# Altium PCB main.PcbDoc
Units mm, origin at the board's own origin, x right, y up, seen from the top; angles counter-clockwise.
Board outline 80 x 30.65 mm, 2 copper layers (Top Layer, Bottom Layer); 38 components, 28 nets, 167 pads, 35 vias.
Unrouted connection lines stored in the file: 1.
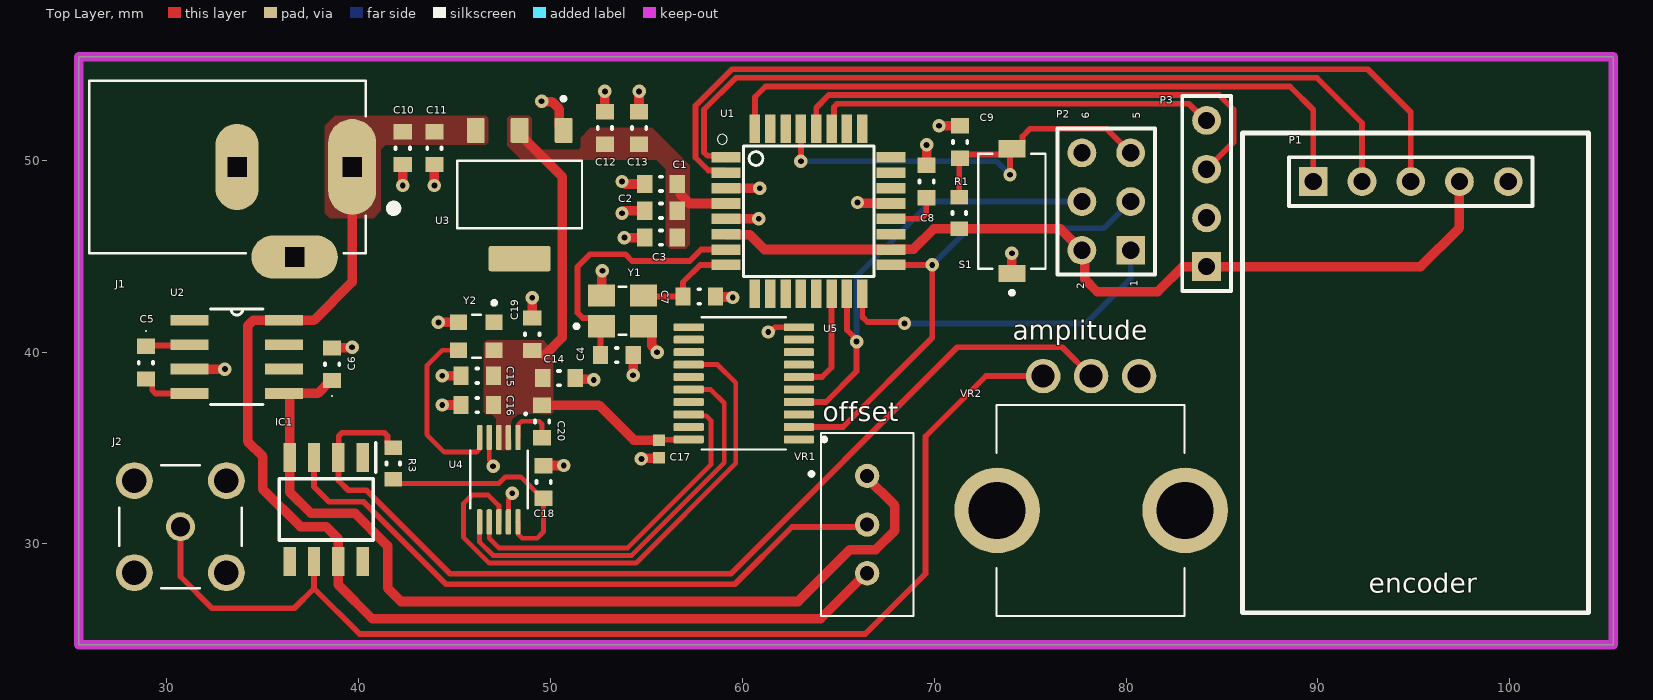
[diagram p0: Top Layer view]
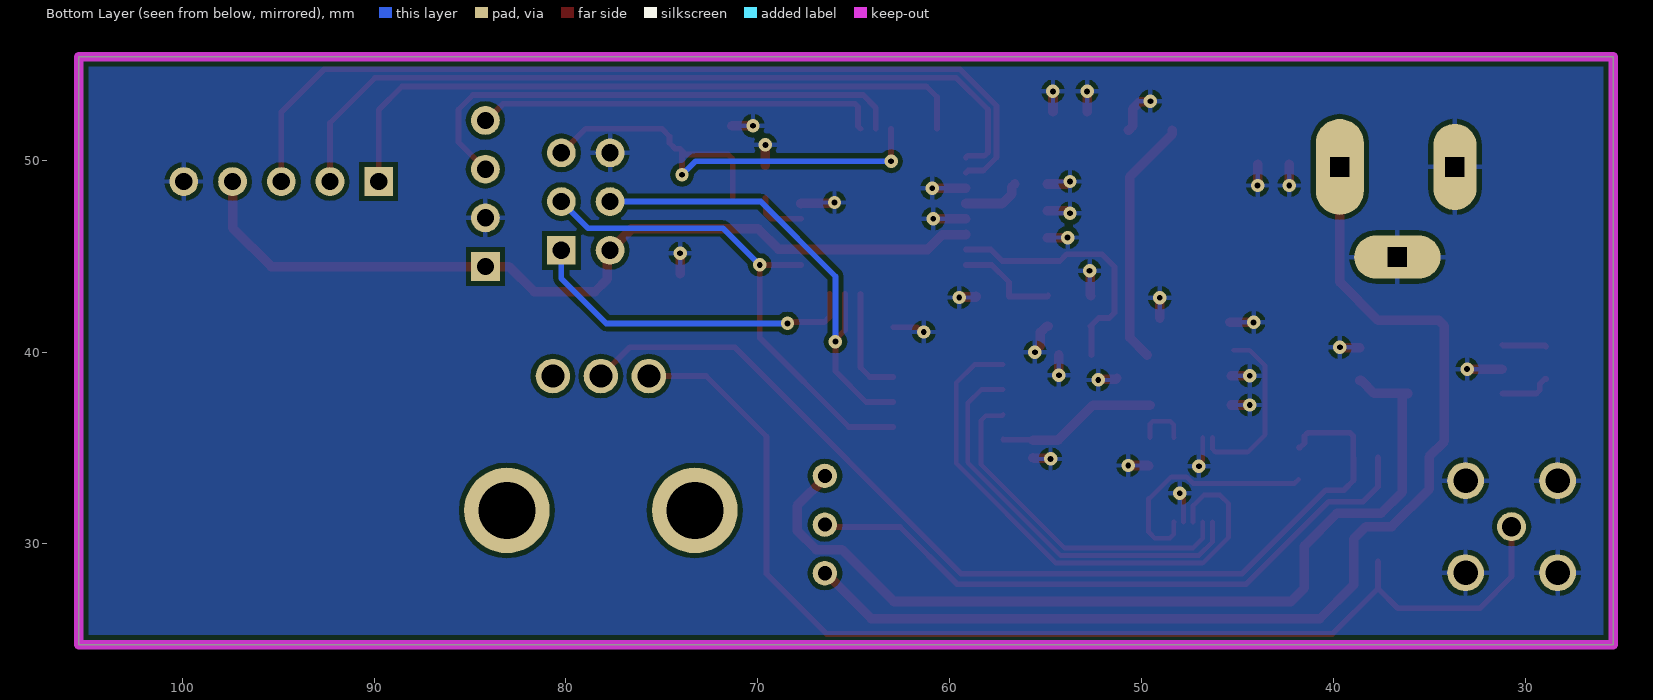
[diagram p1: Bottom Layer view, seen from below]
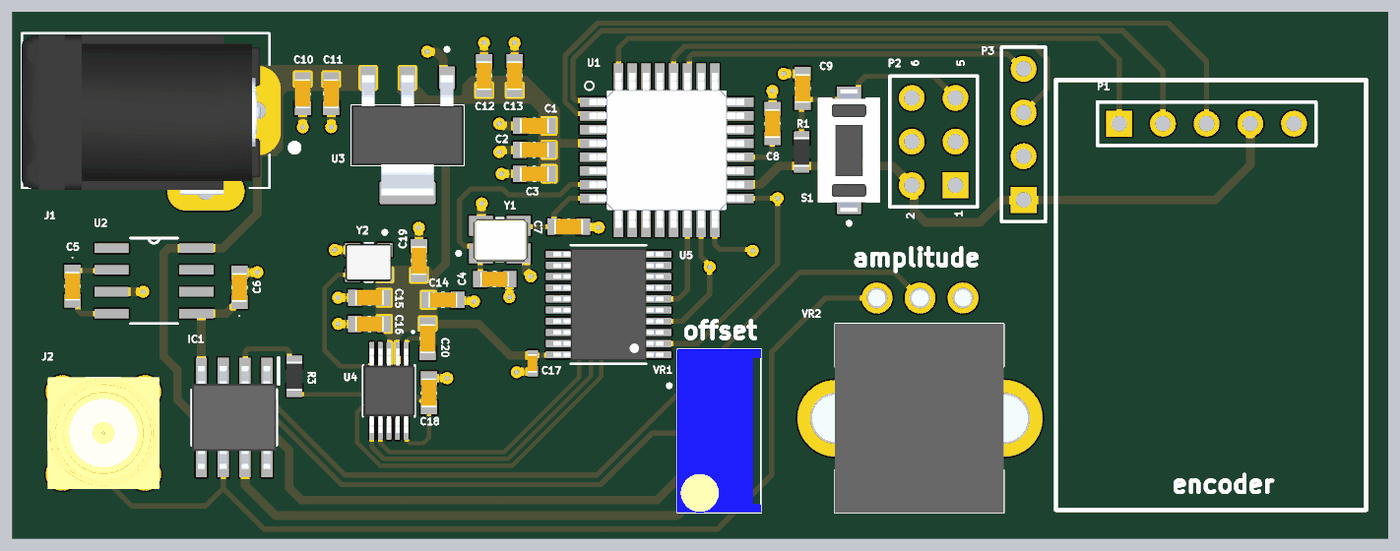
[diagram p2: 3D render of the assembled board from above, using the file's embedded part models]

## Layer stack, top to bottom
Top Solder: solder mask 0.0102, Solder Resist, Dk 3.5
Top Layer: signal copper 0.0356
Dielectric 1: dielectric 0.32, FR-4, Dk 4.8
Bottom Layer: signal copper 0.0356
Bottom Solder: solder mask 0.0102, Solder Resist, Dk 3.5

## Board outline
25.4,24.75 25.4,55.4 105.4,55.4 105.4,24.75

## Design rules (kind name [scope] priority, off if disabled: settings)
Clearance [All] p1: gap=0.254 ignorepadtopadclearanceinfootprint=FALSE except(0: Arc-Hole Track-Hole SMDPad-Hole THPad-Hole Via-Hole Fill-Hole Poly-Hole Region-Hole Text-Hole; 0.127: Track-Track SMDPad-SMDPad SMDPad-Poly SMDPad-Region)
PlaneConnect [All] p1: planeconnectstyle=Direct reliefexpansion=0.508 reliefentries=4 reliefconductorwidth=0.254 reliefairgap=0.254
PolygonConnect PowerConnectStyle [InNet('GND')] p1: connectstyle=Relief reliefconductorwidth=0.254 reliefentries=4 polygonreliefangle="90 Angle" airgapwidth=0.254
PolygonConnect PuddleConnectStyle [All] p2: connectstyle=Direct reliefconductorwidth=0.254 reliefentries=4 polygonreliefangle="90 Angle" airgapwidth=0.254
RoutingVias [All] p1: holewidth=0.711 width=1.27 viastyle="Through Hole" minholewidth=0.711 minwidth=1.27 maxholewidth=0.711 maxwidth=1.27
SolderMaskExpansion [All] p1: expansion=0.102 istentingtop=FALSE
Width [All] p1: maxlimit=0.5 minlimit=0.254 preferedwidth=0.3
29 further rules are at their usual default settings.

## Components (designator, comment, footprint, x,y, rotation, side; value= is the part's Value field where it differs from the comment)
C1 "100nF" CAP_0603 55.753,48.768 r0 top
C2 "100nF" CAP_0603 55.753,47.371 r0 top
C3 "10uF" CAP_0603 55.753,45.974 r0 top
C4 "50pF" CAP_0603 53.45,39.85 r180 top
C5 "10uF" CAP_0603_Polarized 28.9,39.45 r270 top
C6 "10uF" CAP_0603_Polarized 38.608,39.37 r90 top
C7 "50pF" CAP_0603 57.75,42.9 r180 top
C8 "100nF" CAP_0603 69.6,48.9 r270 top
C9 "100nF" CAP_0603 71.35,50.95 r270 top
C10 "10uF" CAP_0603 42.291,50.634 r90 top
C11 "100nF" CAP_0603 43.942,50.634 r90 top
C12 "10uF" CAP_0603 52.832,51.689 r270 top
C13 "100nF" CAP_0603 54.61,51.689 r270 top
C14 "100nF" CAP_0603 50.442,38.646 r180 top
C15 "10uF" CAP_0603 46.174,38.767 r0 top
C16 "100nF" CAP_0603 46.174,37.243 r0 top
C17 "100nF" CAP_0402 55.65,34.95 r90 top
C18 "100nF" CAP_0603 49.631,33.23 r270 top
C19 "100nF" CAP_0603 49.045,40.932 r270 top
C20 "10nF" CAP_0603 49.553,36.387 r90 top
IC1 "TL071CDR" SOIC127P600X175-8N 38.3,31.8 r270 top
J1 "PJ_002AH" DCJack_3pins 39.655,49.657 r0 top
J2 "SMA_Connector" SMA_Connector 30.7,30.9 r0 top
P1 "Header 5" HDR1X5 89.762,48.894 r0 top
P2 "Header 3X2" HDR2X3 80.24,45.31 r90 top
P3 "Header 4" HDR1X4 84.2,44.46 r90 top
R1 "10k" RES_0603 71.3,47.25 r270 top
R3 "2.2k" RES_0603 41.8,34.2 r270 top
S1 "Switch_SPST" SPST-NO_Switch 74.05,44.1 r90 top
U1 "Atmega328-AU" ATMEGA328-AU 59.15,50.15 r0 top
U2 "ICL7660AIBAZA-T" ICL7660AIBAZA-T 31.179,41.656 r0 top
U3 "AMS1117-3.3" SOT229P700X180-4N 50.673,51.562 r270 top
U4 "AD9833BRMZ-REEL7" AD9833BRMZ-REEL7 47.3,33.35 r270 top
U5 "3-Wire Buffer Driver" SOP65P640X120-20N 62.94,35.45 r180 top
VR1 "3296W-1-103" 3296W1103 66.5,33.55 r0 top
VR2 "RK09K1130ACL" RK09K1130ACL 78.179,38.75 r180 top
Y1 "Crystal Oscillator" 4pinOscillator 52.65,41.35 r0 top
Y2 "S3D25.000000A20F30T" OSC_ECS-327TXO-30-TR 47.05,41.55 r180 top

## Footprints (in the part's own frame and the unit in brackets; to place one, negate y for a bottom-side part, rotate by r counter-clockwise, add the part's x,y. Pads: shape width x height; smd on the part's side, far side on the other; paste and mask are expansions set on the pad)
4pinOscillator [mm] "SMD3225-4P"
  rect 1.4x1.15 smd: 1(0,0) 2(2.2,0) 3(2.2,1.6) 4(0,1.6)
  silkscreen extent -1.4,-0.45 1.3,2.05, body extent -0.46,-0.49 2.74,2.01, height 0.6
3296W1103 [mm]
  round 1.269 hole 0.74: 1(0,0) 2(0,-2.54) 3(0,-5.08)
  silkscreen extent -3,-7.3 2.42,2.22, body extent -2.42,-7.29 2.42,2.21, height 11.44
AD9833BRMZ-REEL7 [mm] "10-MSOP"
  rrect50% 1.32x0.28 smd: 1(-2.2,1) 2(-2.2,0.5) 3(-2.2,0) 4(-2.2,-0.5) 5(-2.2,-1) 6(2.2,-1) 7(2.2,-0.5) 8(2.2,0) 9(2.2,0.5) 10(2.2,1)
  silkscreen extent -3.48,-1.5 1.5,1.5, body extent -2.45,-1.5 2.45,1.5, height 1.07
ATMEGA328-AU [mm] "TQFP-32(7x7)"
  rect 1.5x0.55 smd: 1(0,0) 2(0,-0.8) 3(0,-1.6) 4(0,-2.4) 5(0,-3.2) 6(0,-4) 7(0,-4.8) 8(0,-5.6) 17(8.6,-5.6) 18(8.6,-4.8) 19(8.6,-4) 20(8.6,-3.2) 21(8.6,-2.4) 22(8.6,-1.6) 23(8.6,-0.8) 24(8.6,0)
  rect 0.55x1.5 smd: 9(1.5,-7.1) 10(2.3,-7.1) 11(3.1,-7.1) 12(3.9,-7.1) 13(4.7,-7.1) 14(5.5,-7.1) 15(6.3,-7.1) 16(7.1,-7.1) 25(7.1,1.5) 26(6.3,1.5) 27(5.5,1.5) 28(4.7,1.5) 29(3.9,1.5) 30(3.1,1.5) 31(2.3,1.5) 32(1.5,1.5)
  silkscreen extent -0.45,-6.2 7.7,1.2, body extent -0.2,-7.3 8.8,1.7, height 1.18
CAP_0402 [mm] "Chip Capacitor, 2-Leads, Body 1,00x0,50mm, IPC Medium Density, 0402"
  rect 0.6x0.62 smd: 1(-0.46,0) 2(0.46,0)
  body extent -0.55,-0.3 0.55,0.3, height 0.6
CAP_0603 [mm] "Chip Capacitor, 2-Leads, Body 1,60x0,80mm, IPC Medium Density, 0603"
  rect 0.8x0.95 smd: 1(-0.85,0) 2(0.85,0)
  silkscreen extent -0.05,-0.38 0.05,0.38, body extent -0.85,-0.45 0.85,0.45, height 0.6
CAP_0603_Polarized [mm] "Chip Capacitor, 2-Leads, Body 1,60x0,80mm, IPC Medium Density, 0603, Polarized"
  rect 0.8x0.95 smd: 1(-0.85,0) 2(0.85,0)
  silkscreen extent -1.67,-0.38 0.05,0.38, body extent -0.85,-0.45 0.85,0.45, height 0.6
DCJack_3pins [mm]
  oval 2.5x5 hole 1 square: 1(0,0)
  oval 2.25x4.5 hole 1 square: 2(-6,0)
  oval 4.5x2.25 hole 1 square: 3(-3,-4.7)
  silkscreen extent -13.7,-4.5 2.36,4.5, body extent -13.72,-4.9 0.18,4.4, height 11
HDR1X4 [mm] "Connector; Header; 4 Position"
  rect 1.5x1.5 hole 0.9: 1(0,0)
  round 1.5 hole 0.9: 2(2.54,0) 3(5.08,0) 4(7.62,0)
  silkscreen extent -1.27,-1.27 8.89,1.27
HDR1X5 [mm] "Connector; Header; 5 Position"
  rect 1.5x1.5 hole 0.9: 1(0,0)
  round 1.5 hole 0.9: 2(2.54,0) 3(5.08,0) 4(7.62,0) 5(10.16,0)
  silkscreen extent -1.27,-1.27 11.43,1.27
HDR2X3 [mm] "Connector; Header; 3x2 Position"
  rect 1.5x1.5 hole 0.9: 1(0,0)
  round 1.5 hole 0.9: 2(0,2.54) 3(2.54,0) 4(2.54,2.54) 5(5.08,0) 6(5.08,2.54)
  silkscreen extent -1.27,-1.27 6.35,3.81
ICL7660AIBAZA-T [mil] "SOIC-8"
  rect 78x22 smd: 1(0,0) 2(0,-50) 3(0,-100) 4(0,-150) 5(194,-150) 6(194,-100) 7(194,-50) 8(194,0)
  silkscreen extent 43,-173 151,23
OSC_ECS-327TXO-30-TR [mm] "25MHz - 2.5*2.0mm -  SMD3225-4P"
  rect 0.9x0.8 smd: 1(0,0) 2(1.85,0) 3(1.85,1.45) 4(0,1.45)
  silkscreen extent -0.11,-1.12 1.15,1.85, body extent -0.43,-0.39 2.28,1.85, height 1.2
RES_0603 [mm] "Chip Resistor, 2-Leads, Body 1,60x0,80mm, IPC Medium Density, 0603"
  rect 0.75x0.9 smd: 1(-0.825,0) 2(0.825,0)
  silkscreen extent -0.05,-0.35 0.05,0.35, body extent -0.85,-0.45 0.85,0.45, height 0.6
RK09K1130ACL [mm]
  round 1.8 hole 1.2: 1(-2.5,0) 2(0,0) 3(2.5,0)
  round 4.46 hole 2.973: MH1(-4.9,7) MH2(4.9,7)
  silkscreen extent -4.86,1.5 4.94,12.5, body extent -6.28,-0.5 6.29,12.5, height 15.1
SMA_Connector [mm]
  round 1.508 hole 1: 1(0,0)
  round 1.92 hole 1.28: G1(-2.4,2.4) G2(-2.4,-2.4) G3(2.4,-2.4) G4(2.4,2.4)
  silkscreen extent -3.2,-3.2 3.2,3.2, body extent -3.25,-3.25 3.25,3.25, height 13.6
SOIC127P600X175-8N [mm]
  rect 1.525x0.65 smd: 1(-2.712,1.905) 2(-2.712,0.635) 3(-2.712,-0.635) 4(-2.712,-1.905) 5(2.712,-1.905) 6(2.712,-0.635) 7(2.712,0.635) 8(2.712,1.905)
  silkscreen extent -3.47,-2.45 1.6,2.58, body extent -3,-2.45 3,2.45, height 1.75
SOP65P640X120-20N [mm] "3-Wire buffer driver"
  rrect25% 1.57x0.41 smd: 1(0,0) 2(0,-0.65) 3(0,-1.3) 4(0,-1.95) 5(0,-2.6) 6(0,-3.25) 7(0,-3.9) 8(0,-4.55) 9(0,-5.2) 10(0,-5.85) 11(5.74,-5.85) 12(5.74,-5.2) 13(5.74,-4.55) 14(5.74,-3.9) 15(5.74,-3.25) 16(5.74,-2.6) 17(5.74,-1.95) 18(5.74,-1.3) 19(5.74,-0.65) 20(5.74,0)
  silkscreen extent -1.42,-6.38 5.07,0.53, body extent -0.33,-6.18 6.07,0.33, height 1.2
SOT229P700X180-4N [mm] "AMS1117-3.3"
  rrect15% 1.31x0.93 smd: 1(0,0) 2(0,-2.29) 3(0,-4.58)
  rrect15% 1.31x3.24 smd: 4(6.69,-2.29)
  silkscreen extent -1.75,-5.54 5.1,0.96, body extent -0.15,-5.54 6.84,0.96, height 1.8
SPST-NO_Switch [mm]
  rect 0.9x1.4 smd: 1(0,0) 2(6.5,0)
  silkscreen extent -1.1,-1.75 6.25,1.75, body extent -0.32,-1.75 6.78,1.75, height 4.3

## Part data
C1 C2 C3 C4 C7 C8 C9 C10 C11 C12 C13 C14 C15 C16 C18 C19 C20: library part Cap_0603, "Capacitor SMD 0603 Generic"
C5 C6: library part Cap_0603_Polarized, "Capacitor SMD 0603 Generic Polarized"
C17: library part Cap_0402, "Capacitor SMD 0402 Generic"
IC1: "Integrated Circuit", Manufacturer_Name="Texas Instruments", Mouser Part Number=595-TL071CDR, Arrow Part Number=TL071CDR, Arrow Price/Stock=https://www.arrow.com/en/products/tl071cdr/texas-instruments?region=nac, Datasheet Link=http://www.ti.com/lit/gpn/tl071, Height=1.75mm, Manufacturer_Part_Number=TL071CDR, Mouser Price/Stock=https://www.mouser.co.uk/ProductDetail/Texas-Instruments/TL071CDR?qs=odmYgEirbwyeR17frtRMJg%3D%3D
J1: library part DCJack_3pins
J2: "RF Coaxial Straight SMA Connector"
P1: "Header, 5-Pin", LatestRevisionDate=17-Jul-2002, LatestRevisionNote="Re-released for DXP Platform.", Publisher="Altium Limited"
P2: "Header, 3-Pin, Dual row", LatestRevisionDate=17-Jul-2002, LatestRevisionNote="Re-released for DXP Platform.", Publisher="Altium Limited"
P3: "Header, 4-Pin", LatestRevisionDate=17-Jul-2002, LatestRevisionNote="Re-released for DXP Platform.", Publisher="Altium Limited"
R1 R3: library part Res_0603, "Resistor SMD 0603 Generic"
S1: "Switch_SPST 2 pins"
U1: "AVR AVR® ATmega Microcontroller IC 8-Bit 20MHz 32KB (16K x 16) FLASH 32-TQFP (7x7)"
U2: library part ICL7660A, "Charge Pump Switching Regulator IC Positive or Negative Fixed -Vin, 2Vin 1 Output 45mA 8-SOIC (0.154\", 3.90mm Width)"
U3: "Sot223/Pkg 1-Amp 3.3-Volt Low Drop Out Voltage Regulatator"
U4: "Direct Digital Synthesis IC 10 b 25 MHz 28 b Tuning 10-MSOP"
U5: library part SN74HCT244PWR, "Octal Buffers And Line Drivers With 3-State Outputs 20-TSSOP -40 to 85"
VR1: "Variable Resistor", Manufacturer_Name="Chengdu Guosheng Tech", Datasheet Link=https://datasheet.lcsc.com/szlcsc/1811271436_Chengdu-Guosheng-Tech-3296W-1-103_C330432.pdf, Height=10.28mm, Manufacturer_Part_Number=3296W-1-103
VR2: "Variable Resistor", Manufacturer_Name="ALPS Electric", Mouser Part Number=688-RK09K1130ACL, Arrow Part Number=RK09K1130ACL, Arrow Price/Stock=https://www.arrow.com/en/products/rk09k1130acl/alps-electric, Datasheet Link=https://www.alps.com/prod/info/E/HTML/Potentiometer/RotaryPotentiometers/RK09K/RK09K1130ACL.html, Height=15mm, Manufacturer_Part_Number=RK09K1130ACL, Mouser Price/Stock=https://www.mouser.co.uk/ProductDetail/Alps-Alpine/RK09K1130ACL?qs=6EGMNY9ZYDQzEvxfrSIq9A%3D%3D
Y1: library part 4pinOscillator
Y2: library part ECS-327TXO-30-TR, "Oscillator TCXO 0.032768MHz Â±1.5ppm (Tol) Â±5ppm (Stability) 15pF CMOS 60% 3V 4-Pin CSMD T/R"

## Via types
v1: diameter 0.7, hole 0.3, Top Layer to Bottom Layer, 35 vias

## Nets (pads, with @x,y where several pads share a name; then routed paths per layer and width w, separated by ;. In a path a pad name is that pad's centre, name@x,y a point inside that pad or via, vN(x,y) a via of type N, cw(c..) or ccw(c..) an arc to the next point about the centre after c; other vN are vias at no path point)
5V: C1.2 C2.2 C3.2 C12.2 C13.2 C14.2 C15.2 C16.2 C17.2 C19.2 C20.2 P1.4 P2.2 P3.1 R1.2 U1.4 U1.6 U1.18 U3.2 U4.2 U4.3 U5.20 Y2.4 | length 69.6
  Top Layer w0.3: C17.2 55.67,35.43 57.18,35.43 U5.20
  Top Layer w0.5: U3.2 48.383,51.372 50.6,49.155 50.6,40.75 49.7,39.85 ; C20.2 52.513,37.237 54.34,35.41 C17.2 ; C1.2 56.753,48.618 56.753,48.247 57.25,47.75 U1.4 ; U1.6 59.171,46.129 60.371,46.129 61.15,45.35 U1.18 67.771,45.371 68.921,45.371 69.975,46.425 R1.2 76.585,46.425 77.84,45.17 77.84,43.81 78.5,43.15 81.65,43.15 82.96,44.46 P3.1 95.36,44.46 97.382,46.482 P1.4
+12V: C10.2 C11.2 IC1.7 J1.1 U2.8 U3.3 VR1.3 | length 57.8
  Top Layer w0.5: J1.1 39.655,43.655 37.656,41.656 U2.8 34.493,41.656 34.2,41.363 34.2,35.35 35,34.55 35,32.85 36.95,30.9 38.3,30.9 38.935,30.265 IC1.7 38.935,27.865 40.7,26.1 64.073,26.1 VR1.3@66.421,28.448
-12V: C6.1 IC1.4 U2.5 VR1.1 | length 48.1
  Top Layer w0.5: U2.5 36.111,37.85 U2.5@36.428,37.85 ; C6.1 38.533,38.52 37.863,37.85 U2.5@36.428,37.85 ; VR1.1@66.421,33.528 67.95,31.999 67.95,30.7 66.95,29.7 65.6,29.7 62.9,27 42.2,27 41.5,27.7 41.5,29.9 39.8,31.6 37.5,31.6 36.395,32.705 IC1.4 36.395,37.817 U2.5@36.428,37.85
AREF: C8.2 U1.20 | length 2.8
  Top Layer w0.3: U1.20 69.3,46.95 69.58,47.23 69.58,48.031 C8.2
CAP+: C5.1 U2.2 | length 2.3
  Top Layer w0.3: C5.1 28.943,40.343 31.136,40.343 U2.2
CAP-: C5.2 U2.4 | length 2.8
  Top Layer w0.3: C5.2 28.975,38.6 29.225,38.35 29.225,38.022 29.401,37.846 U2.4
COMP: C20.1 U4.1 | length 2.8
  Top Layer w0.254: U4.1 48.313,35.563 48.313,36.214 48.499,36.4 49.4,36.4 49.553,36.247 C20.1
FSYNC: U4.8 U5.14 | length 28.8
  Top Layer w0.254: U4.8 47.3,32 46.75,32.55 45.9,32.55 45.45,32.1 45.45,30.35 46.8,29 54.45,29 59.65,34.2 59.65,38.4 58.7,39.35 U5.14
GND: C1.1 C2.1 C3.1 C4.1 C6.2 C7.1 C8.1 C9.1 C10.1 C11.1 C12.1 C13.1 C14.1 C15.1 C16.1 C17.1 C18.1 C19.1 J1.2 J1.3 J2.G1 J2.G2 J2.G3 J2.G4 P1.5 P2.6 P3.2 S1.1 U1.3 U1.5 U1.21 U2.3 U3.1 U4.4 U4.9 U5.10 Y1.2 Y1.4 Y2.2 | length 38.5
  Top Layer w0.254: U4.4 46.8,34.371 47,34.171 v1(47,34.05) ; U4.9 47.8,32.329 48,32.529 v1(48,32.65)
  Top Layer w0.3: v1(61.35,41.05) 61.458,41.05 61.708,41.3 U5.10
  Top Layer w0.5: U2.3 v1(33.02,39.116) ; C6.2 38.623,40.235 39.635,40.235 v1(39.65,40.25) ; v1(42.291,48.69) C10.1 ; v1(43.942,48.69) C11.1 ; v1(44.15,41.55) Y2.2@45.4,41.55 ; v1(44.349,37.246) 45.321,37.246 C16.1 ; v1(44.349,38.77) 45.321,38.77 C15.1 ; C19.1 v1(49.045,42.837) ; v1(49.53,53.086) 49.554,53.062 50.062,53.062 50.458,52.666 50.458,51.777 U3.1 ; C18.1 49.64,34.09 v1(50.69,34.09) ; C14.1 51.35,38.588 52.212,38.588 v1(52.25,38.55) ; Y1.4 52.675,42.975 52.675,44.225 v1(52.7,44.25) ; C12.1 v1(52.832,53.594) ; v1(53.721,47.244) 53.775,47.244 53.902,47.371 C2.1 ; v1(53.721,48.895) 53.775,48.895 53.902,48.768 C1.1 ; v1(53.848,45.974) C3.1 ; v1(54.3,38.8) C4.1 ; C13.1 v1(54.61,53.594) ; v1(54.736,34.432) 54.765,34.461 55.621,34.461 C17.1 ; Y1.2 54.941,41.35 55.266,41.025 55.266,40.338 55.55,40.054 v1(55.55,40) ; C7.1 58.625,42.875 59.475,42.875 v1(59.5,42.85) ; U1.5 v1(60.85,46.95) ; U1.3 v1(60.9,48.55) ; v1(66,47.8) 66.029,47.771 67.729,47.771 U1.21 ; C8.1 v1(69.6,50.805) ; v1(70.25,51.8) C9.1 ; S1.1 v1(74.05,45.15)
I2C_SCL: P3.4 U1.27 | length 21
  Top Layer w0.3: U1.27 64.771,51.771 64.771,52.774 64.947,52.95 83.273,52.95 84.143,52.08 P3.4
I2C_SDA: P3.3 U1.28 | length 27.1
  Top Layer w0.3: U1.28 63.85,52.747 64.503,53.4 84.85,53.4 85.6,52.65 85.6,50.94 P3.3
IN+: IC1.3 VR1.2 | length 33.7
  Top Layer w0.3: IC1.3 37.665,32.985 38.45,32.2 40.25,32.2 41.25,31.2 44.55,27.9 59.6,27.9 62.587,30.887 66.32,30.887 VR1.2@66.421,30.988
IN-: IC1.2 R3.1 VR2.2 | length 52.5
  Top Layer w0.3: R3.1 41.725,35.025 41.5,35.25 41.5,35.624 41.324,35.8 39.126,35.8 38.95,35.624 38.95,34.527 IC1.2 38.935,33.315 39.45,32.8 40.4,32.8 44.75,28.45 59.4,28.45 71.2,40.25 76.679,40.25 VR2.2
MCLK: U4.5 Y2.3 | length 9.4
  Top Layer w0.254: Y2.3 44.35,40.1 43.55,39.3 43.55,35.7 44.463,34.787 46.138,34.787 46.287,34.936 46.287,35.537 U4.5
OSC1: C4.2 U1.7 Y1.1 | length 13.9
  Top Layer w0.3: C4.2 52.6,41.3 Y1.1 52.225,41.775 51.675,41.775 51.4,42.05 51.4,44.45 52.05,45.1 53.9,45.1 54.25,44.75 57.25,44.75 57.85,45.35 U1.7
OSC2: C7.2 U1.8 Y1.3 | length 5.4
  Top Layer w0.3: Y1.3 54.9,42.9 C7.2 56.9,43.65 57.8,44.55 U1.8
OutputAD9833: C18.2 R3.2 U4.10 | length 12.5
  Top Layer w0.254: R3.2 42.025,33.15 47.3,33.15 47.65,33.5 48.436,33.5 49.556,32.381 C18.2 49.631,30.631 49.3,30.3 48.514,30.3 48.313,30.501 48.313,31.137 U4.10
RESET: C9.2 P2.5 R1.1 S1.2 U1.29 | length 26.4
  Top Layer w0.3: v1(63.05,49.95) U1.29 ; R1.1 71.3,50.05 C9.2 71.55,50.3 73.75,50.3 S1.2@73.95,50.5 ; v1(73.95,49.25) S1.2@73.95,50.5 ; P2.5 78.98,51.65 75,51.65 74.6,51.25 74.6,50.9 74.3,50.6 S1.2 S1.2@73.95,50.5
  Bottom Layer w0.3: v1(63.05,49.95) 73.25,49.95 v1(73.95,49.25)
ROT_CLK: P1.1 U1.32 | length 35.2
  Top Layer w0.3: U1.32 60.65,53.3 61.2,53.85 88.55,53.85 89.762,52.638 P1.1
ROT_DT: P1.2 U1.1 | length 42.5
  Top Layer w0.3: U1.1 59.063,50.237 58.176,50.237 58,50.413 58,52.65 59.65,54.3 73.264,54.3 89.95,54.3 92.302,51.948 P1.2
ROT_SW: P1.3 U1.2 | length 47.3
  Top Layer w0.3: U1.2 59.029,49.471 58.229,49.471 57.55,50.15 57.55,52.85 59.45,54.75 92.6,54.75 94.842,52.508 P1.3
SCLK: U4.7 U5.18 | length 18
  Top Layer w0.254: U4.7 46.8,30.3 47.316,29.784 54.004,29.784 58.366,34.146 58.366,36.433 58.113,36.686 57.264,36.686 U5.18
SDATA: U4.6 U5.16 | length 21.3
  Top Layer w0.254: U4.6 46.3,30.099 46.995,29.403 54.222,29.403 59.05,34.231 59.05,37.35 58.35,38.05 U5.16
Signal: IC1.6 J2.1 VR2.3 | length 60.8
  Top Layer w0.3: J2.1 30.7,28.3 32.35,26.65 36.63,26.65 37.665,27.685 ; IC1.6 37.665,27.735 37.665,27.685 ; VR2.3 72.7,38.75 69.55,35.6 69.55,28.45 66.4,25.3 40.05,25.3 37.665,27.685
SPI_FSYNC: U1.14 U5.6 | length 5.8
  Top Layer w0.3: U5.6 64.15,38.7 64.65,39.2 U1.14
SPI_MISO: P2.1 U1.16 | length 17.8
  Top Layer w0.3: U1.16 66.25,41.85 66.523,41.577 68.373,41.577 v1(68.45,41.5)
  Bottom Layer w0.3: v1(68.45,41.5) 77.9,41.5 80.24,43.84 P2.1
SPI_SCK: P2.3 U1.17 U5.2 | length 26.5
  Top Layer w0.3: U5.2 65.25,36.1 69.9,40.75 v1(69.9,44.55) U1.17
  Bottom Layer w0.3: v1(69.9,44.55) 71.814,46.464 78.854,46.464 P2.3
SPI_SDATA: P2.4 U1.15 U5.4 | length 24.7
  Top Layer w0.3: U5.4 64.35,37.4 65.95,39 v1(65.95,40.55) 65.95,40.658 65.45,41.158 U1.15
  Bottom Layer w0.3: v1(65.95,40.55) 65.95,43.95 69.85,47.85 P2.4
pads on no net: IC1.1 IC1.5 IC1.8 U1.9 U1.10 U1.11 U1.12 U1.13 U1.19 U1.22 U1.23 U1.24 U1.25 U1.26 U1.30 U1.31 U2.1 U2.6 U2.7 U3.4 U5.1 U5.3 U5.5 U5.7 U5.8 U5.9 U5.11 U5.12 U5.13 U5.15 U5.17 U5.19 VR2.1 VR2.MH1 VR2.MH2 Y2.1

## Polygon pours and split planes (outlines as drawn)
5V on Top Layer "5V_PowerPuddle1" (solid, pour order 3): 47.879,52.324 47.752,52.197 47.752,50.748 48.462,50.038 55.499,50.038 56.007,49.53 56.007,45.593 56.2,45.4 57.05,45.4 57.25,45.6 57.25,49.75 55.311,51.689 52.07,51.689 51.562,51.181 51.562,50.673 51.435,50.546 49.403,50.546 49.022,50.927 49.022,52.197 48.895,52.324
5V on Top Layer "5V_PowerPuddle2" (solid, remove dead copper, pour order 7): 47.925,34.875 47.975,34.925 47.975,36.475 48.275,36.775 50.025,36.775 50.125,36.875 50.125,39.975 49.65,40.625 46.675,40.625 46.525,40.475 46.525,36.875 46.625,36.775 46.925,36.775 47.175,36.525 47.175,34.925 47.225,34.875
+12V on Top Layer "+12V_PowerPuddle" (solid, remove dead copper, pour order 2): 38.481,46.99 38.227,47.244 38.227,51.816 38.735,52.324 46.609,52.324 46.736,52.197 46.736,50.927 46.609,50.8 41.402,50.8 41.148,50.546 41.148,47.371 40.767,46.99
GND on Bottom Layer "GND_PowerPlane" (solid, remove dead copper, pour order 8): 25.4,24.75 25.4,55.4 105.4,55.4 105.4,24.75

## Keep-outs
Keep-Out Layer:
  the board outline again, w0.5

## Silkscreen, mask and mechanical layers (free items; w line width, h text height)
Top Overlay:
  lines w0.254: 86.079,26.434 86.079,51.434 ; 86.113,26.415 104.113,26.415 104.113,51.434 86.113,51.434
  text "amplitude" at 74.087,40.638 h1
  text "offset" at 64.2,36.4 h1
  text "encoder" at 92.65,27.45 h1

## Text inside footprints (layer, text, board x,y; h text height)
P2: Top Overlay "1" at 80.621,43.405 h0.4 r90; Top Overlay "2" at 77.827,43.278 h0.4 r90; Top Overlay "5" at 80.748,52.168 h0.4 r90; Top Overlay "6" at 78.081,52.168 h0.4 r90